# EAGLE board smart_home_demo (EAGLE 6.6.0)
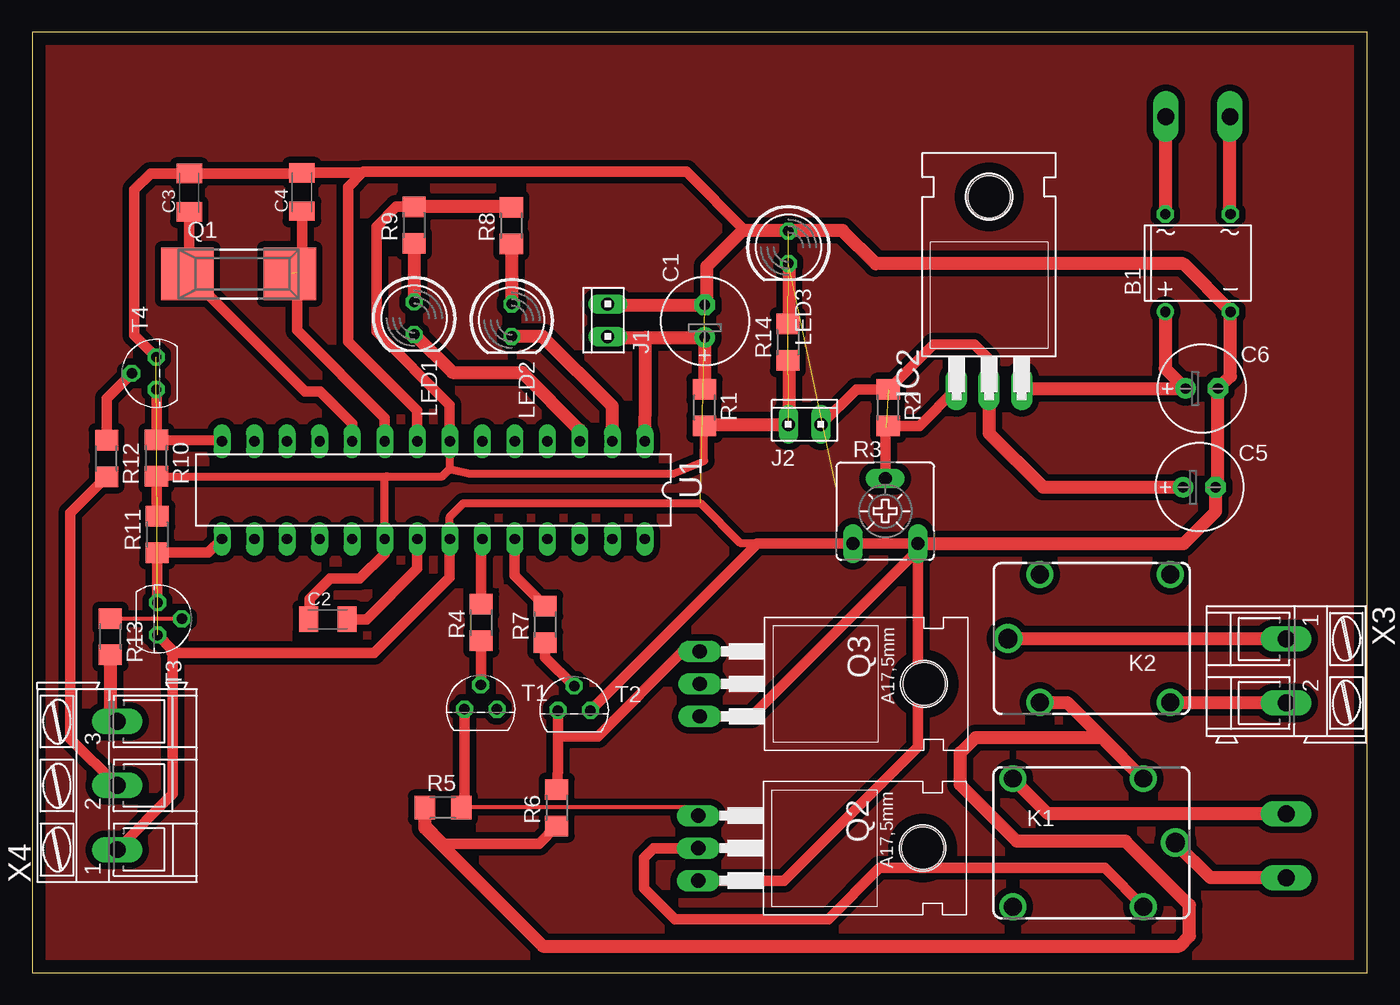
[diagram p0: board, top side]
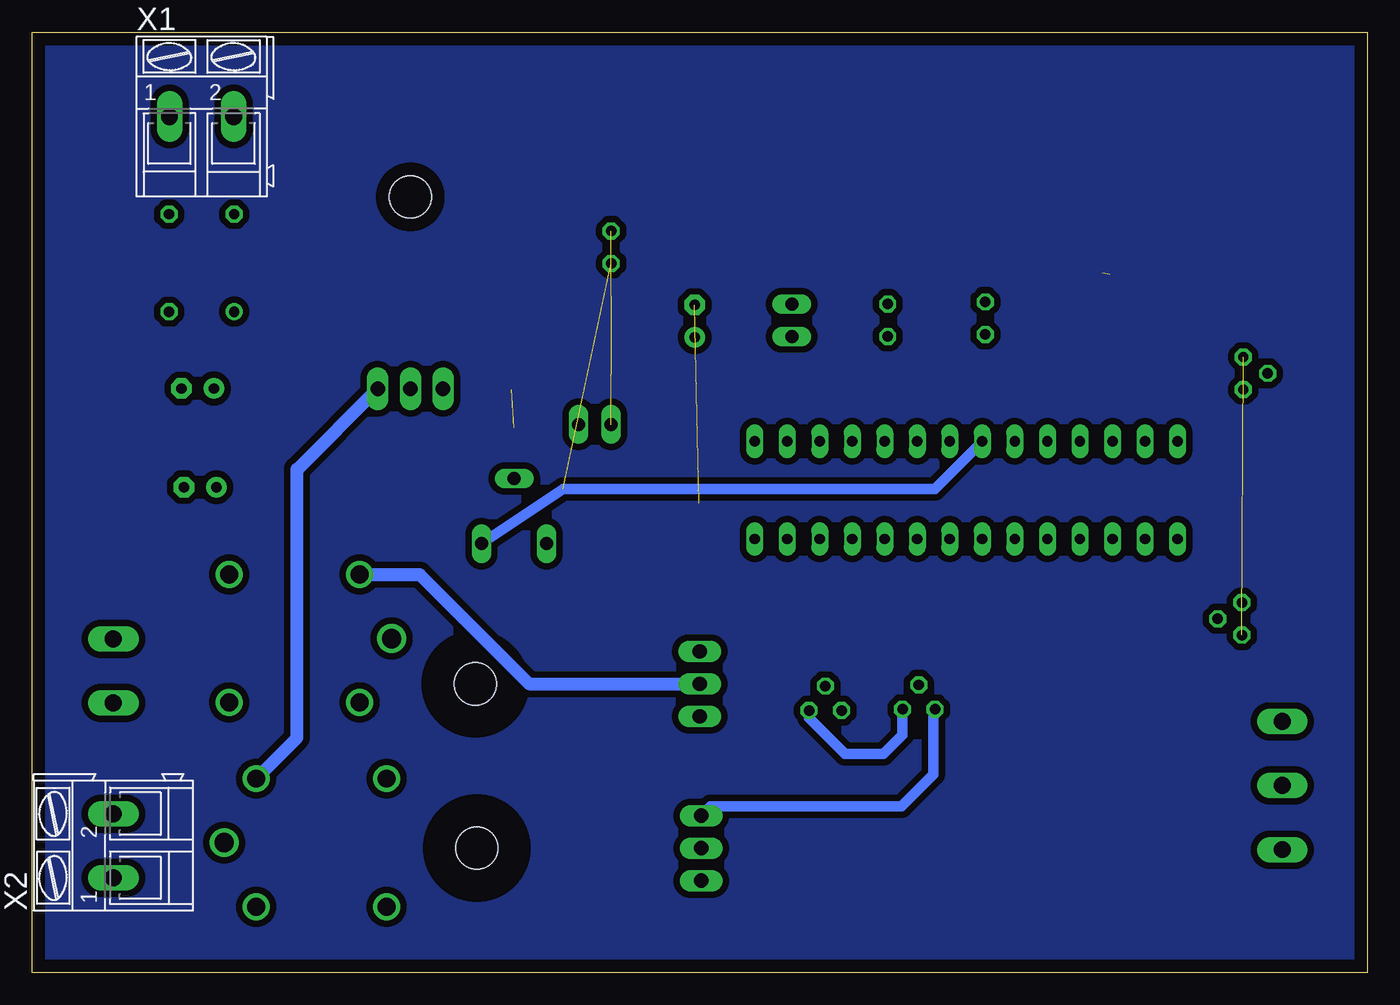
[diagram p1: board, bottom side, seen from below]

Size 104.3 x 73.5 mm. Coordinates in mm from the lower left corner, seen from the top.
Outline: 0,0 104.3,0 104.3,73.5 0,73.5 0,0
Copper layers (1*16): Top 0.035mm / dielectric 1.5mm / Bottom 0.035mm
Design rules "default *": minimum track width 10mil, minimum drill 24mil, track to track 20mil, track to pad 20mil, pad to pad 20mil, via to via 20mil, smd to smd 20mil, copper to edge 40mil, drill to drill 8mil, minimum pad ring 10mil, minimum via ring 8mil, stop-mask expansion 4mil, vias tented up to drill 0mil, thermal gap 10mil

## Footprints (pad centres in the part's own frame; a part is rotated, then mirrored left to right if it is on the bottom)
DB = drill 0.813: + -2.54,-3.81 | drill 0.813 octagon: - 2.54,-3.81; AC1 2.54,3.81; AC2 -2.54,3.81
E2,5-7 = drill 0.813 pad 1.6: + -1.27,0 | drill 0.813 pad 1.6 octagon: - 1.27,0
C1206K = smd 1.5 x 2: 1 -1.5,0; 2 1.5,0
TO220H = drill 1.118 long: 1 -2.54,-10.16; 2 0,-10.16; 3 2.54,-10.16 | hole 3.302: 0,4.826
10X02MTA = drill 1.016 long: 1 1.27,0; 2 -1.27,0
JJM1C = drill 1.4: 1 4.05,5; 2 4.05,-5; NC -6.15,-5; NO -6.15,5 | drill 1.5: C 6.55,0
LED5MM = drill 0.813 octagon: A -1.27,0; K 1.27,0
MC-405 = smd 4.1 x 4.1: 1 -4,0; 2 4,0
TO220 = drill 1.118 long: 1 -2.54,-6.35; 2 0,-6.35; 3 2.54,-6.35 | hole 3.302: 0,11.176
R1206 = smd 1.6 x 1.803: 1 -1.422,0; 2 1.422,0
CA6V = drill 1.016 long: A -2.54,-2.54; E 2.54,-2.54; S 0,2.54
TO92 = drill 0.813 octagon: 1 1.27,0; 2 0,1.905; 3 -1.27,0
DIL28-3 = drill 0.813 long: 1 -16.51,-3.81; 2 -13.97,-3.81; 3 -11.43,-3.81; 4 -8.89,-3.81; 5 -6.35,-3.81; 6 -3.81,-3.81; 7 -1.27,-3.81; 8 1.27,-3.81; 9 3.81,-3.81; 10 6.35,-3.81; 11 8.89,-3.81; 12 11.43,-3.81; 13 13.97,-3.81; 14 16.51,-3.81; 15 16.51,3.81; 16 13.97,3.81; 17 11.43,3.81; 18 8.89,3.81; 19 6.35,3.81; 20 3.81,3.81; 21 1.27,3.81; 22 -1.27,3.81; 23 -3.81,3.81; 24 -6.35,3.81; 25 -8.89,3.81; 26 -11.43,3.81; 27 -13.97,3.81; 28 -16.51,3.81
AK300/2 = drill 1.321 long: 1 -2.515,0; 2 2.489,0
AK300/3 = drill 1.321 long: 1 -5.004,0; 2 0,0; 3 5.004,0

## Placement (x,y rotation side)
B1  DBDB101G  [DB]  91.05,55.46 0 top
C1  10uF  [E2,5-7]  52.55,50.91 90 top
C2  100nF  [C1206K]  23.1,27.62 0 top
C3  100nF  [C1206K]  12.28,60.95 90 top
C4  100nF  [C1206K]  21.08,61 90 top
C5  10uF  [E2,5-7]  91.18,37.95 0 top
C6  10uF  [E2,5-7]  91.35,45.65 0 top
IC2  LM340H-05  [TO220H]  74.75,55.8 0 top
J1  RST  [10X02MTA]  44.95,50.99 90 top
J2  RST  [10X02MTA]  60.34,42.85 0 top
K1  JJM1-12V  [JJM1C]  82.75,10.18 0 top
K2  JJM1-12V  [JJM1C]  82.76,26.12 180 top
LED1  [LED5MM]  29.85,51.15 270 top
LED2  [LED5MM]  37.47,50.99 270 top
LED3  [LED5MM]  59.07,56.69 270 top
Q1  8MHz  [MC-405]  16.14,54.59 0 top
Q2  BUZ11  [TO220]  58.39,9.75 270 top
Q3  BUZ11  [TO220]  58.49,22.58 270 top
R1  10k  [R1206]  52.52,44.15 270 top
R2  240 Ohm  [R1206]  66.87,44.15 270 top
R3  5k  [CA6V]  66.64,36.08 0 top
R4  1k  [R1206]  35.08,27.37 90 top
R5  1k  [R1206]  32.09,12.92 0 top
R6  1k  [R1206]  40.98,12.91 90 top
R7  1k  [R1206]  40.08,27.23 90 top
R8  240 Ohm  [R1206]  37.43,58.39 90 top
R9  240 Ohm  [R1206]  29.83,58.43 90 top
R10  1k  [R1206]  9.72,40.21 270 top
R11  1k  [R1206]  9.78,34.25 90 top
R12  1k  [R1206]  5.82,40.19 270 top
R13  1k  [R1206]  6.12,26.27 270 top
R14  240 Ohm  [R1206]  59.03,49.27 90 top
T1  BC547  [TO92]  35.04,20.6 0 top
T2  BC547  [TO92]  42.34,20.5 0 top
T3  BC547  [TO92]  9.8,27.66 270 top
T4  BC547  [TO92]  9.7,46.84 90 top
U1  MEGA8-P  [DIL28-3]  31.35,37.71 180 top
X1  [AK300/2]  91.05,66.89 0 bottom
X2  [AK300/2]  97.95,9.95 90 bottom
X3  [AK300/2]  97.95,23.58 270 top
X4  [AK300/3]  6.65,14.64 90 top

## Library data of the parts
B1 = rectifier
C1-C6 R1 R2 R4-R14 = rcl
IC2 = linear
J1 J2 = con-amp
K1 K2 = relay; MF: AROMAT/ MATSUSHITA; MPN: JJM1-12V; OC_FARNELL: unknown; OC_NEWARK: 10C7318
LED1-LED3 = led
Q1 = crystal; OC_FARNELL: unknown; OC_NEWARK: unknown
Q2 Q3 = transistor-fet
R3 = pot
T1-T4 = transistor
U1 = atmel; OC_FARNELL: unknown; OC_NEWARK: unknown
X1-X4 = con-ptr500; OC_FARNELL: unknown; OC_NEWARK: unknown

## Nets
N$1: C1.- J1.1 U1.22
N$2: C1.+ J1.2 R1.1 U1.1
N$3: C2.2 U1.21
N$4: C2.1 J2.2 R1.2 R8.2 R9.2 R10.2 R11.2 R14.2 U1.7 U1.20
N$5: B1.- C3.2 C4.2 C5.- C6.- LED3.K Q2.3 Q3.3 R3.E T1.1 T2.1 T3.1 T4.1 U1.8 X4.1
N$6: C4.1 Q1.2 U1.9
N$7: C3.1 Q1.1 U1.10
N$8: C5.+ IC2.2 J2.1 R2.1 R3.S
N$9: B1.AC1 X1.1
N$10: B1.AC2 X1.2
N$11: R7.1 T2.2
N$12: IC2.1 R2.2
N$13: R4.2 U1.23
N$14: R4.1 T1.2
N$15: Q2.1 R5.2 T1.3
N$16: B1.+ C6.+ IC2.3 K1.1 K2.1 R5.1 R6.1
N$17: K1.2 Q2.2
N$18: R7.2 U1.24
N$19: K1.C X2.1
N$20: K1.NO X2.2
N$21: K2.C X3.1
N$22: K2.NO X3.2
N$23: Q3.1 R6.2 T2.3
N$24: K2.2 Q3.2
N$25: LED2.A R8.1
N$26: LED1.A R9.1
N$27: R10.1 T4.3 U1.14
N$28: R11.1 T3.3 U1.15
N$29: R12.1 T4.2
N$30: R13.1 T3.2
N$32: R12.2 X4.2
N$33: R13.2 X4.3
N$34: LED1.K U1.3
N$35: LED2.K U1.2
N$36: LED3.A R14.1

## Tracks (layer width: path | path; a pad name or v marks a point on that pad's centre or on a via)
N$1  (1 unrouted)
  Top 0.61: U1.22 32.62,35.62 33.7,36.7 52.2,36.7 55.3,33.6 69.2,33.6
  Top 1.016: J1.1 45.03,52.18 C1.-
N$2
  Top 1.016: R1.1 52.55,45.6 C1.+ 47.9,49.64 | J1.2 45.03,49.64 47.9,49.64 | U1.1 47.9,45.46 47.9,49.64
N$3
  Top 0.813: C2.2 26.12,27.62 30.08,31.58 U1.21
N$4  (1 unrouted)
  Top 0.61: U1.7 32.62,39.38 | 32.62,39.38 34.2,39 50.1,39 52.5,40 52.5,42.71 | R10.2 27.7,38.79 | 27.7,38.79 32.03,38.79 32.62,39.38 | U1.20 27.54,38.63 27.7,38.79
  Top 0.813: U1.7 32.62,44.38 26.9,50.1 26.9,58.3 28.45,59.85 R9.2 | 52.5,42.71 R1.2 | R11.2 9.72,35.73 R10.2 | C2.1 21.7,27.72 21.7,29.2 23.3,30.8 25.6,30.8 27.54,32.74 U1.20
  Top 1.016: R1.2 52.64,42.85 J2.2 | R8.2 37.39,59.85 R9.2
N$5  (2 unrouted)
  Top 0.813: U1.8 30.08,43.92 24.7,49.3 24.7,61.4 25.8,62.5 | 25.8,62.5 25.9,62.6 | 25.8,62.5 C4.2 21.03,62.45 C3.2 9.25,62.45 8,61.2 8,49.81 T4.1 | T3.1 11,25.19 11,13.99 X4.1 | Q3.3 56.2,20.04 69.7,33.54 | Q2.3 58.71,7.21 69.18,17.68 R3.E | T2.1 56.65,33.54 69.9,33.54
  Top 1.016: B1.- 93.59,46.62 C6.- 92.62,38.12 C5.- 92.45,36.05 89.94,33.54 69.9,33.54 69.7,33.54 R3.E
  Bottom 0.813: T1.1 36.31,18.59 37.8,17.1 40.8,17.1 43.61,19.91 T2.1 | U1.8 33.8,37.8 62.82,37.8 R3.E
N$6  (1 unrouted)
  Top 0.813: C4.1 21.08,55.08 20.7,54.7 20.7,50.2 27.54,43.36 U1.9
N$7
  Top 0.813: C3.1 12.28,54.73 Q1.1 21.33,45.4 22.5,45.4 25,42.9 U1.10
N$8  (1 unrouted)
  Top 0.813: 61.63,42.83 64.38,45.57 R2.1 70.4,49.1 73.6,49.1 74.7,48 74.7,45.69 IC2.2 | R3.S 66.64,42.54 66.7,42.6
  Top 1.016: IC2.2 74.75,42.15 78.95,37.95 C5.+ | J2.1 61.63,42.83
N$9
  Top 1.016: B1.AC1 93.56,59.27 X1.1
N$10
  Top 1.016: B1.AC2 88.56,59.27 X1.2
N$11
  Top 0.813: T2.2 40.08,24.66 R7.1
N$12
  Top 0.813: R2.2 69.3,42.73 IC2.1
N$13
  Top 0.813: R4.2 35.08,33.82 U1.23
N$14
  Top 0.813: R4.1 35.08,22.55 T1.2
N$15
  Top 0.305: Q2.1 51.41,12.92 R5.2
  Top 0.813: R5.2 33.77,13.18 T1.3
N$16
  Top 0.813: R6.1 39.59,10.1 32.2,10.1 30.67,11.63 R5.1
  Top 1.016: B1.+ 88.51,47.22 C6.+ IC2.3 | R5.1 30.67,11.33 39.9,2.1 89.6,2.1 90.4,2.9 90.4,5.3 85.4,10.3 76.9,10.3 72.5,14.7 72.5,17.2 73.7,18.4 83.58,18.4 K1.1 80.86,21.12 K2.1
  Bottom 1.016: K1.1 83.6,18.38 83.6,39.33 IC2.3
N$17
  Top 0.813: K1.2 83.78,8.2 66.2,8.2 62.2,4.2 50.2,4.2 47.8,6.6 47.8,9 48.55,9.75 Q2.2
N$18
  Top 0.813: R7.2 37.7,31.03 U1.24
N$19
  Top 1.016: X2.1 92.05,7.43 K1.C
N$20
  Top 1.016: X2.2 79.34,12.44 K1.NO
N$21
  Top 1.016: K2.C 97.92,26.12 X3.1
N$22
  Top 1.016: K2.NO 97.92,21.12 X3.2
N$23
  Top 0.813: R6.2 41.07,15.88 41.07,18.5 | 41.07,18.5 T2.3 | Q3.1 50.82,25.12 44.2,18.5 41.07,18.5
N$24
  Bottom 1.016: K2.2 74.02,31.12 65.48,22.58 Q3.2
N$25
  Top 1.016: R8.1 37.47,56.93 LED2.A
N$26
  Top 1.016: R9.1 29.85,56.99 LED1.A
N$27
  Top 0.813: U1.14 14.78,41.58 R10.1 9.72,45.55 T4.3
N$28
  Top 0.813: U1.15 13.77,32.83 R11.1 9.78,28.95 T3.3
N$29
  Top 0.813: T4.2 5.82,44.87 R12.1
N$30
  Top 0.305: R13.1 11.67,27.69 T3.2
N$31
  Bottom 0.813: 33.9,20.4 33.9,15.5 36.4,13 51.3,13 52.1,12.2
N$32
  Top 0.813: R12.2 3,35.95 3,18.29 X4.2
N$33
  Top 1.016: R13.2 6.12,20.17 X4.3
N$34
  Top 1.016: LED1.K 32.83,46.9 38.3,46.9 42.78,42.42 U1.3
N$35
  Top 1.016: U1.2 45.32,44.28 39.88,49.72 LED2.K
N$36  (1 unrouted)
  Top 1.016: R14.1 59.1,47.82 59.1,42.8
N$37
  pour Top: 0.1,73.3 104.3,73.3 104.3,0 0.1,0
N$38
  Top 1.016: 59,55.4 59.1,55.3 59.1,50.5
N$39
  Top 0.813: 25.9,62.6 51.1,62.6 55.7,58
  Top 1.016: 52.7,52.2 52.7,55.2 55.5,58 55.7,58 63.3,58 65.9,55.4 89.9,55.4 93.6,51.7
N$40
  pour Bottom: 0.1,73.4 104.3,73.4 104.3,0 0.1,0
N$41
  Top 0.813: 32.6,33.9 32.6,30.9 26.7,25 10.9,25